# EAGLE board NEW 電源基板 (EAGLE 9.6.2)
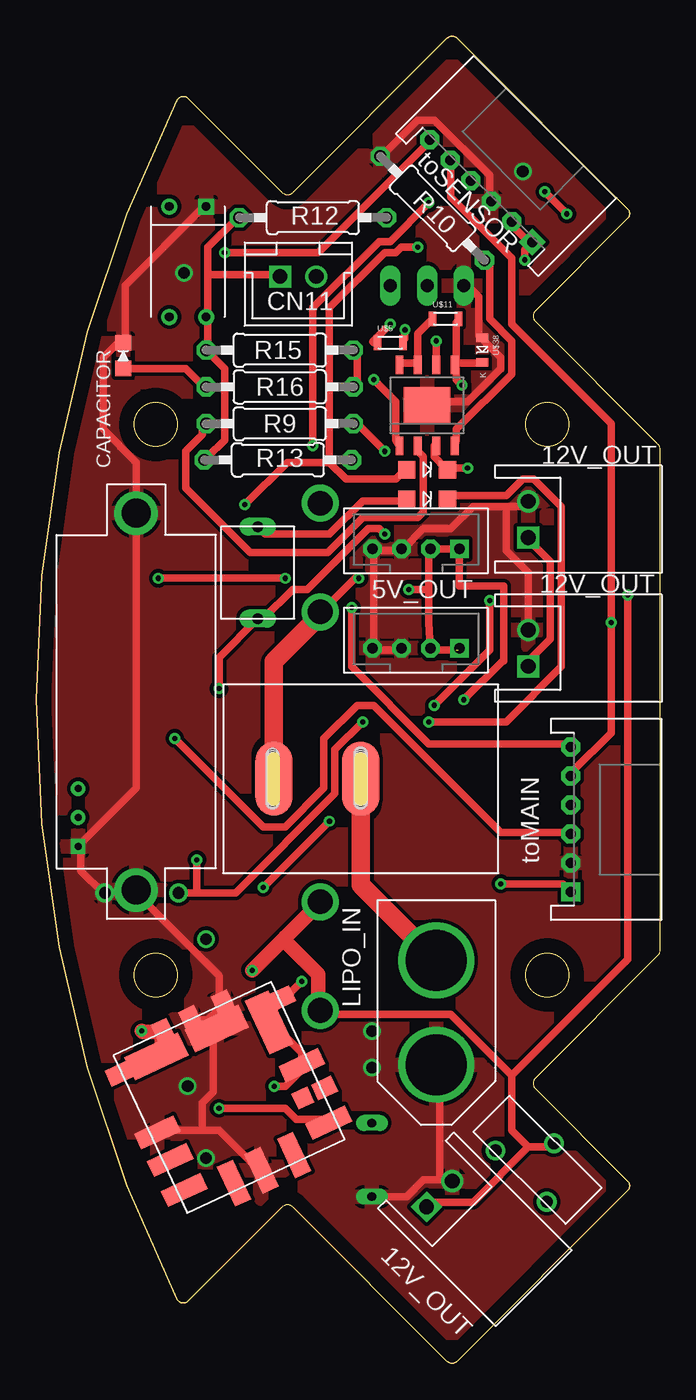
[diagram p0: board, top side]
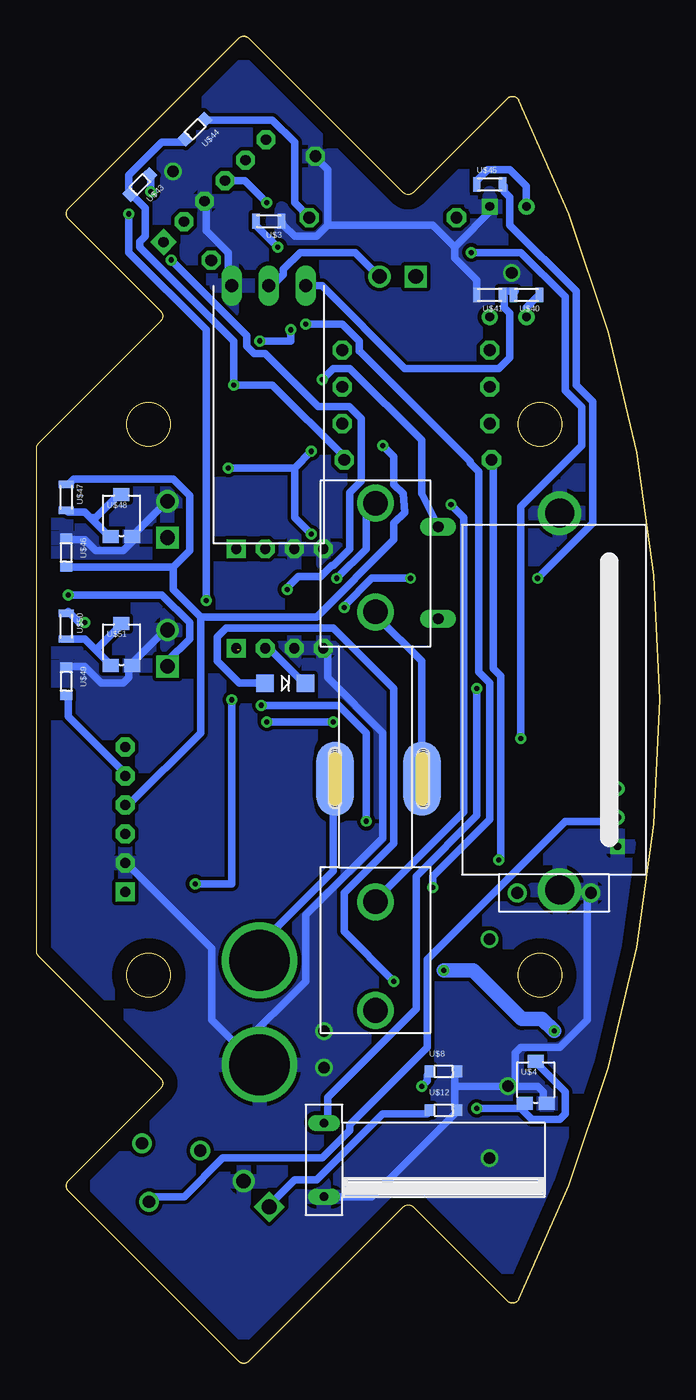
[diagram p1: board, bottom side, seen from below]

Size 43 x 91.58 mm. Coordinates in mm from the lower left corner, seen from the top.
Outline: 40.79,79.69 arc-90 40.79,78.98
Outline: 34.43,72.62 arc90 34.43,71.91
Outline: 34.43,19.67 42.85,28.1 arc45 43,28.45 43,63.13 arc45 42.85,63.48 34.43,71.91
Outline: 34.43,19.67 arc90 34.43,18.96
Outline: 40.79,12.6 arc-90 40.79,11.89
Outline: 29.04,0.15 arc-90 28.34,0.15
Outline: 17.69,10.79 arc90 16.99,10.79
Outline: 10.5,4.31 arc-109 9.7,4.44
Outline: 9.7,4.44 arc-53 9.7,87.15
Outline: 9.7,87.15 arc-109 10.5,87.28
Outline: 16.99,80.79 arc90 17.69,80.79
Outline: 28.34,91.44 arc-90 29.04,91.44
Outline: 17.69,10.79 28.34,0.15
Outline: 29.04,0.15 40.79,11.89
Outline: 9.7,87.15 arc53 9.7,4.44
Outline: 16.99,80.79 10.5,87.28
Outline: 28.34,91.44 17.69,80.79
Outline: 40.79,79.69 29.04,91.44
Outline: 40.79,78.98 arc90 40.79,79.69
Outline: 34.43,72.62 40.79,78.98
Outline: 34.43,72.62 arc90 34.43,71.91
Outline: 16.99,80.79 arc90 17.69,80.79
Outline: 16.99,80.79 arc90 17.69,80.79
Outline: 10.5,87.28 arc109 9.7,87.15
Outline: 17.69,10.79 arc90 16.99,10.79
Outline: 10.5,4.31 16.99,10.79
Outline: 9.7,4.44 arc109 10.5,4.31
Outline: 28.34,0.15 arc90 29.04,0.15
Outline: 40.79,12.6 34.43,18.96
Outline: 40.79,11.89 arc90 40.79,12.6
Outline: 34.43,19.67 arc90 34.43,18.96
Outline: 29.04,91.44 arc90 28.34,91.44
Outline: circle at 8.25,64.79 radius 1.5
Outline: circle at 8.25,26.79 radius 1.5
Outline: circle at 35.25,26.79 radius 1.5
Outline: circle at 35.25,64.79 radius 1.5
Copper layers (1*16): Top 0.035mm / dielectric 1.5mm / Bottom 0.035mm
Design rules "default": minimum track width 6mil, minimum drill 0.35mm, track to track 6mil, track to pad 6mil, pad to pad 6mil, via to via 6mil, smd to smd 6mil, copper to edge 40mil, drill to drill 6mil, minimum pad ring 10mil, minimum via ring 8mil, stop-mask expansion 4mil, vias tented up to drill 0mil, thermal gap 10mil
Net classes: 0 default: width 0.508 mm, clearance 0.254 mm
Holes 0.85 mm at 16.29,41.73 16.29,38.68 16.29,40.2 16.29,41.35 16.29,41.6 16.29,41.47 16.29,41.22 16.29,41.09 16.29,40.97 16.29,40.84 16.29,40.71 16.29,40.58 16.29,40.46 16.29,40.33 16.29,40.08 16.29,39.95 16.29,39.82 16.29,39.7 16.29,39.57 16.29,39.44 16.29,39.31 16.29,39.19 16.29,39.06 16.29,38.93 16.29,38.81 22.39,41.73 22.39,42.11 22.39,41.98 22.39,41.85 22.39,41.6 22.39,41.47 22.39,41.35 22.39,41.22 22.39,41.09 22.39,40.97 22.39,40.84 22.39,40.71 22.39,40.58 22.39,40.46 22.39,40.33 22.39,40.2 22.39,40.08 22.39,39.95 22.39,39.82 22.39,39.7 22.39,39.57 22.39,39.44 22.39,39.31 22.39,39.19 22.39,39.06 22.39,38.93 22.39,38.81 22.39,38.68 16.29,41.85 16.29,41.98

## Footprints (pad centres in the part's own frame; a part is rotated, then mirrored left to right if it is on the bottom)
LED1608 = smd 1.05 x 1.08: A -0.875,0; K 0.875,0
S2B-XH-A = drill 1.016 square: 1 1.25,0 | drill 1.016: 2 -1.25,0
B2B-XH-A = drill 1.016 square: 1 -1.25,0 | drill 1.016: 2 1.25,0
FUSE = drill 1.7: P$1 -17.5,0; P$2 -10,0; P$3 10,0; P$4 17.5,0
0207/10 = drill 0.813 octagon: 1 -5.08,0; 2 5.08,0
HSOP8 = smd 0.54 x 1.27: 1 -1.905,-2.785; 2 -0.635,-2.785; 3 0.635,-2.785; 4 1.905,-2.785; 5 1.905,2.785; 6 0.635,2.785; 7 -0.635,2.785; 8 -1.905,2.785 | smd 3.2 x 2.51: 9 0,0
SW3 = smd 2.54 x 5.08: P$1 0,0; P$2 -6,0 | smd 2.54 x 5.08 bottom: P$3 0,0; P$4 -6,0
DC-DC = smd 3 x 1.2: P$1 -5.5,-0.1; P$2 -5.5,-2.19; P$3 -5.5,-4.48; P$7 5.5,-4.48; P$8 5.5,-0.1 | smd 1.2 x 3: P$4 -2.19,-5.5; P$5 -0.1,-5.5; P$6 2.39,-5.5 | smd 4.07 x 1.77: P$9 -3.335,4.685; P$10 1.245,4.685 | smd 1.77 x 4.07: P$11 4.685,3.535 | smd 1.5 x 1.2: P$12 6.25,-2.19 | smd 1.2 x 1.2: P$13 4.6,-2.19 | smd 1.63 x 1.2: P$14 -6.2,4.685; P$18 6.2,4.68 | smd 1.2 x 1.63: P$15 -2.19,6; P$16 -0.1,6; P$17 2.39,6
1608 = smd 0.508 x 1.016: P$1 -0.889,0; P$2 0.889,0
VR = smd 1.1 x 0.9: P$1 0,1.45; P$2 -0.75,-1.45; P$3 0.75,-1.45
V = drill 0.5 square: P$1 10,-4 | drill 0.5: P$2 8,-4; P$3 6,-4 | drill 2: P$4 -13,0; P$5 13,0
XT60 = drill 4.2: P$1 -3.6,0; P$2 3.6,0
CON = smd 0.6 x 0.813: P$1 -1,0; P$2 1,0
SSW = drill 0.85: P$1 -2.5,1.6; P$2 2.5,1.6; P$3 0,-1.6
D = smd 1.2 x 1.2: P$1 -1.4,0; P$2 1.4,0
I = drill 0.75 long: P$1 0,0; P$2 6.35,0
MOS = drill 0.9 long: P$1 -2.54,0; P$2 0,0; P$3 2.54,0
PHOTOCOUPLER = drill 0.6 square: P$1 -3.81,1.27 | drill 0.6: P$2 -3.81,-1.27; P$3 3.81,-1.27; P$4 3.81,1.27
TD = smd 0.6 x 0.8: P$1 -0.85,0; P$2 0.85,0
FG2 = drill 0.8: P$1 -2.54,0; P$2 2.54,0
10 = drill 0.6 long: P$1 -1.27,-1.27; P$2 3.81,-1.27
B4B-PH-K-S = drill 0.7 pad 1.3 square: 1 3,0 | drill 0.7 pad 1.3 octagon: 2 1,0; 3 -1,0; 4 -3,0
S6B-PH-K-S = drill 0.7 pad 1.3 square: 1 5,0 | drill 0.7 pad 1.3 octagon: 2 3,0; 3 1,0; 4 -1,0; 5 -3,0; 6 -5,0

## Placement (x,y rotation side)
CAPACITOR  LED1608  [LED1608]  6,69.54 90 top
CN5  [S2B-XH-A]  33.94,58.24 270 top
CN6  [S2B-XH-A]  33.94,49.35 270 top
CN7  [S2B-XH-A]  27.81,11.69 225 top
CN11  [B2B-XH-A]  18.07,75 0 top
FUES1  [FUSE]  19.59,41.85 90 bottom
R9  [0207/10]  16.8,64.84 0 top
R10  [0207/10]  27.33,79.71 315 top
R12  [0207/10]  19.09,79.07 0 top
R13  [0207/10]  16.67,62.34 0 top
R15  [0207/10]  16.8,69.92 0 top
R16  [0207/10]  16.8,67.38 180 top
U1  L5973D  [HSOP8]  26.96,66.11 0 top
U$1  SW3  [SW3]  22.39,40.33 0 top
U$2  DCDC  [DC-DC]  13.3,18.34 25 top
U$3  R  [1608]  26.96,78.81 180 bottom
U$4  VR  [VR]  8.54,19.38 0 bottom
U$5  R  [1608]  24.42,70.43 0 top
U$6  V  [V]  6.89,45.66 270 top
U$7  XT60  [XT60]  27.59,24.2 270 top
U$8  1608  [CON]  14.89,20.14 0 bottom
U$9  SSW  [SSW]  34.58,14.04 135 top
U$10  D  [D]  25.82,46.93 0 bottom
U$11  R  [1608]  28.23,72.08 0 top
U$12  1608  [CON]  14.89,17.47 0 bottom
U$13  I  [I]  15.28,51.38 90 top
U$32  D  [D]  26.96,61.67 0 top
U$33  D  [D]  26.96,59.63 0 top
U$36  MOS  [MOS]  26.96,74.37 180 bottom
U$37  PHOTOCOUPLER  [PHOTOCOUPLER]  10.45,76.02 270 top
U$38  TD  [TD]  30.77,69.92 270 top
U$39  FGFG2  [FG2]  7.27,32.46 0 bottom
U$40  R  [1608]  9.18,73.73 180 bottom
U$41  R  [1608]  11.72,73.73 180 bottom
U$42  10  [10]  21.88,15.31 270 bottom
U$43  1608  [CON]  35.85,81.35 225 bottom
U$44  1608  [CON]  32.04,85.16 225 bottom
U$45  R  [1608]  11.72,81.35 0 bottom
U$46  1608  [CON]  40.93,55.95 270 bottom
U$47  R  [1608]  40.93,59.76 270 bottom
U$48  VR  [VR]  37.12,58.49 0 bottom
U$49  1608  [CON]  40.93,47.06 270 bottom
U$50  R  [1608]  40.93,50.87 270 bottom
U$51  VR  [VR]  37.12,49.6 0 bottom
X1  B4B-PH-K-S  [B4B-PH-K-S]  26.2,56.21 0 top
X2  B4B-PH-K-S  [B4B-PH-K-S]  26.2,49.35 0 top
X5  S6B-PH-K-S  [S6B-PH-K-S]  30.68,80.9 315 top
X6  S6B-PH-K-S  [S6B-PH-K-S]  36.87,37.54 270 top

## Library data of the parts
CAPACITOR = generic
CN5-CN7 CN11 = jst-xh
FUES1 = fuse
R9 R10 R12 R13 R15 R16 = rcl; SPICEPREFIX: R
U1 = l5973d
U$1 = SW3
U$2 = OKL
U$3 U$5 U$11 U$40 U$41 U$45 U$47 U$50 = R 1608
U$4 U$48 U$51 = VR tippu
U$6 = voltmeter
U$7 = XT60
U$8 U$12 U$43 U$44 U$46 U$49 = con1608
U$9 = SSW
U$10 U$32 U$33 = D 40V2A
U$13 = Inductor_Read
U$36 = MOS-FET
U$37 = Photo coupler
U$38 = ZD 3.9V200mW
U$39 = C FG
U$42 = 10uF50V 電解
X1 X2 X5 X6 = con-JST PH

## Nets
+5V: U$10.P$2 X1.1 X1.2 X2.1 X2.2 X5.1 X5.2 X6.1
+12V: CN5.1 CN6.1 CN7.1 FUES1.P$1 FUES1.P$2 U$2.P$9 U$2.P$14 U$2.P$15 U$3.P$2 U$9.P$3 U$12.P$1 U$32.P$1
B1: U$46.P$2 U$47.P$1 X5.4 X6.4
B2: U$49.P$2 U$50.P$1 X5.5 X6.5
FLED: X5.6 X6.3
GND: CAPACITOR.K CN5.2 CN6.2 CN7.2 R10.1 U1.9 U$2.P$1 U$2.P$5 U$2.P$10 U$2.P$16 U$2.P$17 U$3.P$1 U$4.P$3 U$6.P$1 U$6.P$4 U$6.P$5 U$7.P$2 U$8.P$2 U$12.P$2 U$36.P$3 U$37.P$1 U$38.P$1 U$39.P$2 U$41.P$2 U$42.P$2 U$46.P$1 U$48.P$3 U$49.P$1 U$51.P$3 X1.3 X1.4 X2.3 X2.4 X5.3 X6.2
K: U$45.P$2 X6.6
N$2: U$6.P$2 U$9.P$1
N$3: U$2.P$7 U$4.P$1 U$4.P$2
N$4: U$2.P$8 U$2.P$11 U$2.P$18 U$8.P$1 U$10.P$1
N$6: FUES1.P$3 FUES1.P$4 U$1.P$2 U$1.P$4
N$7: U$1.P$1 U$1.P$3 U$7.P$1
N$27: CN11.1 R12.1 R13.1 R15.1 U$33.P$2 U$37.P$4 U$39.P$1
N$28: U$37.P$3 U$40.P$1
N$29: CN11.2 U$36.P$2
N$30: U$36.P$1 U$40.P$2 U$41.P$1
N$32: R9.2 U1.3 U$13.P$1 U$32.P$2 U$42.P$1
N$33: R9.1 U1.2
N$34: R10.2 U1.4
N$35: R13.2 U1.5 U$11.P$2 U$38.P$2 U$43.P$2 U$44.P$2
N$36: R12.2 U$44.P$1
N$38: U1.6 U$5.P$2
N$39: U$5.P$1 U$43.P$1
N$40: U$37.P$2 U$45.P$1
N$41: U$47.P$2 U$48.P$1 U$48.P$2
N$42: U$50.P$2 U$51.P$1 U$51.P$2
N$43: R15.2 R16.1
N$44: CAPACITOR.A R16.2
PGND: U1.7 U1.8 U$11.P$1
SW: U1.1 U$13.P$2 U$33.P$1

## Tracks (layer width: path | path; a pad name or v marks a point on that pad's centre or on a via)
+5V  (via drill 0.35)  (1 unrouted)
  Top 0.508: X5.2 32.8,78.56 33.94,77.41 X5.1 33.69,76.84 v33.69,76.14 | 28.99,49.22 27.21,49.22 X2.2 27.09,51.11 27.09,53.41 | 29.12,49.22 X2.1 | 27.09,53.41 27.09,56.21 X1.2 X1.1 29.2,53.64 32.27,53.64 32.27,48.46 32.17,48.46 v29.5,45.79 | X6.1 36.31,33.09 v32.04,33.09 | v25.69,53.41 27.09,53.41
  Bottom 0.508: U$10.P$2 24.55,46.93 26.83,49.22 X2.2 | v29.5,45.79 29.5,33.09 v32.04,33.09 | v33.69,76.14 30.71,73.17 30.71,73.16 28.48,70.93 28.48,70.19 27.96,69.67 27.21,69.67 23.55,66.01 21.4,66.01 20.58,65.2 20.58,60.89 21.38,60.09 21.38,56.2 22.52,55.06 22.63,55.06 23.39,54.3 24.93,54.3 25.69,53.54 v25.69,53.41
+12V  (via drill 0.35)
  Top 0.508: CN6.1 33.94,48.46 35.47,49.98 35.47,55.32 33.94,56.84 CN5.1 | 33.94,14.93 35.47,14.93 U$9.P$3 | 33.94,14.93 30.13,11.12 27.09,11.12 CN7.1 | v40.8,53.03 40.8,27.88 32.8,19.88 | 32.8,19.88 32.8,16.07 33.94,14.93 | v26.32,77.03 25.18,77.03 24.8,76.65 24.04,76.65 20.23,72.84 20.23,62.17 | 20.23,62.17 21.37,61.03 24.8,61.03 25.18,61.41 U$32.P$1 | U$2.P$14 5.75,20.26 7.27,20.26 8.04,21.03 U$2.P$9 8.42,21.41 8.42,22.55 U$2.P$15 | v14.89,27.12 17.18,29.41 19.47,31.69 FUES1.P$2 | 19.47,24.46 FUES1.P$1 19.85,24.07 28.61,24.07 32.8,19.88 | 20.23,62.17 17.31,62.17 v14.39,59.25
  Top 1.016: U$2.P$15 7.35,22.86 v7.27,22.93 | v14.89,27.12 19.59,31.82 FUES1.P$2 | 19.47,24.46 19.46,24.46 19.46,26.83 17.18,29.12 17.18,29.41
  Bottom 0.508: U$12.P$1 16.04,17.22 19.09,17.22 23.66,12.64 25.18,12.64 26.71,11.12 CN7.1 | v40.8,53.03 34.33,53.03 32.42,51.13 32.42,49.98 33.94,48.46 CN6.1 | v26.32,77.03 27.85,78.56 U$3.P$2 | v14.39,59.25 13.5,58.36 13.5,38.04 19.47,32.08 FUES1.P$2
  Bottom 1.016: v7.27,22.93 8.11,23.77 9.5,23.77 12.86,27.12 v14.89,27.12
B1  (via drill 0.35)
  Top 0.508: v19.09,63.32 19.09,72.84 23.66,77.41 24.42,77.41 v27.09,80.08
  Bottom 0.508: 33.56,54.94 40.8,54.94 U$46.P$2 | 33.56,54.94 32.42,56.08 32.42,59.89 33.56,61.03 40.42,61.03 40.8,60.65 U$47.P$1 | 31.66,51.51 23.66,51.51 18.32,56.84 18.32,57.98 17.58,58.72 17.68,60.01 18.32,60.65 18.32,62.56 v19.09,63.32 | 31.66,51.51 33.56,53.41 33.56,54.94 | 31.66,51.51 31.66,43.51 36.61,38.55 X6.4 | v27.09,80.08 28.61,81.61 29.75,81.61 X5.4
B2  (via drill 0.35)
  Top 0.508: X6.5 36.99,40.84 39.66,43.51 v39.66,51.13 39.66,64.84 32.8,71.7 32.8,76.27 28.61,80.46 28.61,82.75 X5.5
  Bottom 0.508: U$49.P$2 40.8,45.79 40.8,44.65 36.99,40.84 X6.5 | v39.66,51.13 40.04,51.13 40.8,51.89 U$50.P$1
FLED  (via drill 0.35)
  Top 0.508: v12.99,76.65 19.47,76.65 27.09,84.27 X5.6 | v9.56,43.12 15.66,37.03 17.18,37.03 19.85,39.7 19.85,43.12 22.13,45.41 23.28,45.41 32.04,36.65 36.61,36.65 X6.3
  Bottom 0.508: v12.99,76.65 9.56,76.65 6.51,73.6 6.51,67.13 5.37,65.98 5.37,63.32 9.56,59.13 v9.56,43.12
GND  (via drill 0.8)
  Top 0.508: U$36.P$3 29.75,74.37 30.52,73.6 30.52,70.94 U$38.P$1 30.9,70.56 32.04,69.41 32.04,68.65 29.75,66.37 27.09,66.37 U1.9 | U$37.P$1 11.47,79.7 6.13,74.37 6.13,70.56 CAPACITOR.K 5.75,70.56 4.61,69.41 4.61,64.46 6.89,62.17 U$6.P$4 6.89,39.7 3.08,35.89 U$6.P$1 3.08,35.5 3.08,33.98 4.61,32.46 U$39.P$2 6.89,32.46 | X5.3 31.28,80.46 31.28,81.99 27.47,85.8 26.32,85.8 24.04,83.51 R10.1 | 11.85,23.69 10.7,23.69 U$2.P$16 | U$2.P$10 11.82,23.67 11.85,23.69 | 11.85,23.69 12.61,24.46 U$2.P$17 12.61,24.84 12.61,26.74 6.89,32.46 | 11.85,23.69 U$2.P$10 | 11.47,16.07 8.42,16.07 U$2.P$1 | 11.47,16.07 12.61,16.07 15.28,13.41 U$2.P$5 | 11.47,16.07 11.47,17.98 12.23,18.74 12.23,22.93 U$2.P$10 | 6.89,32.46 U$6.P$5 | 23.28,49.22 24.93,49.22 X2.3 | 23.4,49.22 X2.4 23.28,49.44 23.28,56.08 | 23.28,56.08 25.18,56.08 25.31,56.21 | 23.28,56.08 23.28,56.21 X1.4 | 32.42,59.13 30.13,59.13 28.61,57.6 26.71,57.6 25.31,56.21 | 32.42,59.13 33.94,59.13 CN5.2 | 25.31,56.21 X1.3 | CN6.2 33.94,54.55 32.42,56.08 32.42,59.13 | U$42.P$2 25.56,11.5 26.71,12.64 27.85,12.64 | 27.85,12.64 28.61,12.64 CN7.2 | 27.85,12.64 27.85,20.26 U$7.P$2
  Bottom 0.508: X5.3 31.28,80.08 31.28,78.18 29.75,76.65 29.75,74.37 U$36.P$3 | 22.9,78.56 23.66,77.8 25.18,77.8 25.94,78.56 U$3.P$1 | 22.9,78.56 22.9,82.37 23.66,83.13 R10.1 | U$41.P$2 12.61,74.75 14.13,76.27 14.13,77.03 | 14.13,77.03 11.47,79.7 U$37.P$1 | 22.9,78.56 15.66,78.56 14.13,77.03 | U$49.P$1 40.8,48.08 39.66,48.08 38.52,46.93 36.99,46.93 36.61,47.32 36.61,48.08 U$51.P$3 36.23,48.46 33.94,50.74 CN6.2 | U$46.P$1 40.8,56.84 39.66,56.84 38.9,56.08 36.99,56.08 36.23,56.84 U$48.P$3 36.23,57.22 33.94,59.51 CN5.2 | 14.13,19.12 14.13,19.88 U$8.P$2 | 14.13,19.12 14.13,17.6 U$12.P$2 14.13,17.22 19.85,11.5 U$42.P$2 | 14.13,19.12 v10.45,19.12 9.94,19.12 | 9.94,19.12 8.42,19.12 8.04,18.74 8.04,17.98 U$4.P$3 | 28.99,21.79 27.85,20.65 U$7.P$2 28.99,21.79 | 28.99,21.79 30.9,23.69 30.9,28.65 36.61,34.36 X6.2 | 28.99,21.79 24.42,26.36 24.42,30.93 19.09,36.27 19.09,43.51 22.9,47.32 22.9,49.13 X2.4 | 9.94,19.12 9.94,21.41 9.56,21.79 6.89,21.79 4.99,23.69 4.99,32.46 U$39.P$2
  other vias: 33.56,82.24 10.2,75.26 23.15,20.39 23.15,22.93 11.72,14.17
  pour Top: -3.52,92.78 -3.52,5.15 -8.6,0.07 44.74,0.07 49.82,-5.01 49.82,92.78 47.28,95.32 0.29,95.32
  pour Bottom: -8.6,-3.74 -9.87,-5.01 53.63,-5.01 54.9,-3.74 54.9,96.59 53.63,97.86 -9.87,96.59
K  (via drill 0.35)
  Top 0.508: v17.18,54.17 v8.42,54.17 | v21.75,52.14 21.75,48.08 27.09,42.74 36.61,42.74 X6.6
  Bottom 0.508: v8.42,54.17 4.61,57.98 4.61,66.37 5.75,67.51 5.75,73.99 10.32,78.56 10.32,80.46 10.7,80.84 10.7,81.22 U$45.P$2 | v17.18,54.17 19.85,54.17 21.75,52.27 v21.75,52.14
N$2
  Bottom 0.508: U$6.P$2 3.08,37.41 6.51,37.41 16.04,27.88 16.04,21.79 21.37,16.45 21.37,16.07 23.28,14.17 30.13,14.17 32.8,11.5 35.09,11.5 U$9.P$1
N$3  (via drill 0.35)
  Top 0.508: v12.61,17.6 17.18,17.6 17.94,16.84 19.85,16.84 U$2.P$7
  Bottom 0.508: 9.56,17.6 8.8,16.84 6.89,16.84 6.51,17.22 6.51,18.74 8.42,20.65 U$4.P$1 | v12.61,17.6 9.56,17.6 | 9.56,17.6 U$4.P$2
N$4  (via drill 0.35)
  Top 0.508: v16.42,19.12 17.18,19.12 18.32,20.26 U$2.P$8 18.32,20.65 18.32,21.41 16.42,23.31 U$2.P$11 16.42,23.69 16.42,24.46 16.8,24.84 U$2.P$18 17.18,25.22 v18.32,26.36
  Bottom 0.508: v16.42,19.12 16.04,19.5 16.04,19.88 U$8.P$1 | U$10.P$1 28.99,46.93 30.52,48.46 30.52,50.11 29.88,50.74 22.51,50.74 18.32,46.55 18.32,35.89 21.75,32.46 21.75,29.79 v18.32,26.36
N$6  (via drill 0.35)
  Top 0.508: 19.47,51.51 FUES1.P$3 19.7,51.87 22.01,54.17 v22.26,54.17
  Top 1.27: U$1.P$4 16.39,48.43 19.47,51.51
  Bottom 0.508: U$1.P$4 16.42,40.46 16.42,48.46 19.47,51.51 FUES1.P$3 | v22.26,54.17 20.23,56.21 20.23,58.78 FUES1.P$4
N$7
  Top 1.27: U$1.P$3 22.39,33.01 U$7.P$1
  Bottom 0.508: U$1.P$3 22.51,40.08 22.51,33.98 27.47,29.03 27.47,27.88 U$7.P$1
N$27  (via drill 0.35)
  Top 0.508: R13.1 11.85,62.56 12.99,63.7 12.99,68.65 R15.1 11.85,70.18 11.85,72.08 U$37.P$4 11.85,72.46 11.85,75.13 | 11.85,75.13 11.85,77.03 13.75,78.94 R12.1 | 11.85,75.13 16.8,75.13 CN11.1 | v27.09,44.27 32.42,44.27 36.23,48.08 36.23,59.13 34.33,61.03 33.56,61.03 32.42,59.89 28.61,59.89 U$33.P$2 | v22.51,44.27 20.61,42.36 20.61,39.31 13.75,32.46 11.08,32.46 | U$39.P$1 11.08,32.46 | 11.08,32.46 v11.08,34.74
  Bottom 0.508: v22.51,44.27 v27.09,44.27 | v11.08,34.74 10.96,34.87 10.96,47.44 11.47,47.95 11.47,62.17 R13.1
N$28
  Bottom 0.508: U$40.P$1 9.18,72.84 U$37.P$3
N$29
  Bottom 0.508: U$36.P$2 26.71,74.37 25.94,75.13 25.94,75.51 24.8,76.65 20.99,76.65 19.47,75.13 CN11.2
N$30
  Bottom 0.508: U$40.P$2 9.94,73.99 10.7,73.99 U$41.P$1 10.7,73.6 10.7,72.84 10.32,72.46 10.32,69.41 11.08,68.65 17.56,68.65 23.28,74.37 U$36.P$1
N$32  (via drill 0.35)
  Top 0.508: U1.3 27.47,63.32 27.47,62.56 28.23,61.79 U$32.P$2 28.61,61.79 v29.75,61.79 | v24.04,62.94 22.13,64.84 R9.2 | v12.61,46.55 12.61,48.71 U$13.P$1 15.66,51.38 17.69,53.41 18.7,53.41 22.9,57.6 23.66,57.6 v24.04,57.22
  Bottom 0.508: 25.18,61.79 v29.75,61.79 | v24.04,62.94 25.18,61.79 | v12.61,46.55 12.61,37.79 16.8,33.6 16.8,24.46 22.9,18.36 22.9,16.84 U$42.P$1 | 25.18,61.79 25.18,58.36 v24.04,57.22
N$33
  Top 0.508: U1.2 26.32,62.94 26.71,62.56 26.71,58.75 26.32,58.36 22.51,58.36 20.1,55.95 14.77,55.95 10.32,60.4 10.32,62.94 11.47,64.08 11.47,64.84 R9.1
N$34
  Top 0.508: U1.4 28.99,63.7 28.99,64.46 32.8,68.27 32.8,70.56 31.28,72.08 31.28,75.89 R10.2
N$35  (via drill 0.35)
  Top 0.508: 28.99,69.03 30.52,69.03 U$38.P$2 | 28.99,69.03 28.99,71.83 U$11.P$2 | 28.99,69.03 U1.5 28.99,68.65 28.99,67.89 v29.37,67.51
  Bottom 0.508: U$44.P$2 32.8,84.27 34.33,84.27 36.61,81.99 36.61,80.84 U$43.P$2 36.23,80.46 35.47,79.7 35.47,77.8 35.85,77.41 35.85,77.03 29.37,70.56 v29.37,67.51 26.71,67.51 21.75,62.56 R13.2
N$36
  Bottom 0.508: R12.2 25.18,80.08 25.18,84.27 26.71,85.8 31.28,85.8 U$44.P$1
N$38  (via drill 0.35)
  Top 0.508: U$5.P$2 25.31,70.71 25.41,70.71 25.41,71.32 v25.44,71.32 | v27.59,70.56 U1.6
  Bottom 0.508: v25.44,71.32 25.44,70.56 v27.59,70.56
N$39  (via drill 0.35)  (1 unrouted)
  Top 0.508: v36.61,79.32 v35.09,80.84 | v31.28,52.65 31.28,49.22 v27.47,45.41 | v15.66,32.84 v20.23,37.41 | v24.42,71.7 23.21,70.49 23.28,70.43 U$5.P$1
  Bottom 0.508: v35.09,80.84 35.09,81.99 U$43.P$1 | v36.61,79.32 36.61,76.65 31.28,71.32 v31.28,52.65 | v27.47,45.41 22.13,45.41 20.23,43.51 v20.23,37.41 | v15.66,32.84 15.66,33.6 11.72,37.54 11.72,46.93 12.48,47.7 12.48,61.54 13.05,62.11 13.05,62.24 20.67,69.86 | 20.71,69.86 20.71,70.53 21.88,71.7 v24.42,71.7
N$40
  Bottom 0.508: U$37.P$2 9.18,81.22 10.32,82.37 11.85,82.37 12.61,81.61 U$45.P$1
N$41
  Bottom 0.508: 39.28,58.36 38.14,57.22 U$48.P$2 | 39.28,58.36 39.66,58.75 40.8,58.75 U$47.P$2 | 39.28,58.36 38.9,58.36 37.37,59.89 U$48.P$1
N$42
  Bottom 0.508: U$50.P$2 39.66,49.98 38.9,49.22 | 38.9,49.22 38.14,48.46 U$51.P$2 | 38.9,49.22 37.37,50.74 U$51.P$1
N$43
  Top 0.508: R16.1 22.13,67.51 22.13,69.79 R15.2
N$44
  Top 0.508: CAPACITOR.A 6.13,68.65 10.32,68.65 11.47,67.51 R16.2
PGND
  Top 0.508: U$11.P$1 26.32,71.06 26.32,69.03 | 26.32,69.03 25.18,69.03 U1.8 | 26.32,69.03 U1.7
S$4  (via drill 0.8)
  other vias: 11.72,29.28
SW  (via drill 0.35)
  Top 0.508: U$13.P$2 15.78,57.22 20.23,57.22 22.51,59.51 25.18,59.51 U$33.P$1 | v23.28,67.89 24.8,66.37 24.8,63.7 U1.1
  Bottom 0.508: v23.28,67.89 22.51,68.65 21.37,68.65 16.42,63.7 16.42,60.02 U$13.P$2

## Text on the board
tPlace: toSENSOR | 12V_OUT | 5V_OUT | 12V_OUT | toMAIN | LIPO_IN | 12V_OUT